# Altium PCB PCB_2020-12-27_16-28-50_2021-02-20_20-59-34.pcbdoc
Units mil, origin at the board's own origin, x right, y up, seen from the top; angles counter-clockwise.
Board outline 1772 x 1772 mil, 4 copper layers (Top Layer, Mid-Layer 1, Mid-Layer 2, Bottom Layer); 56 components, 51 nets, 244 pads, 208 vias.
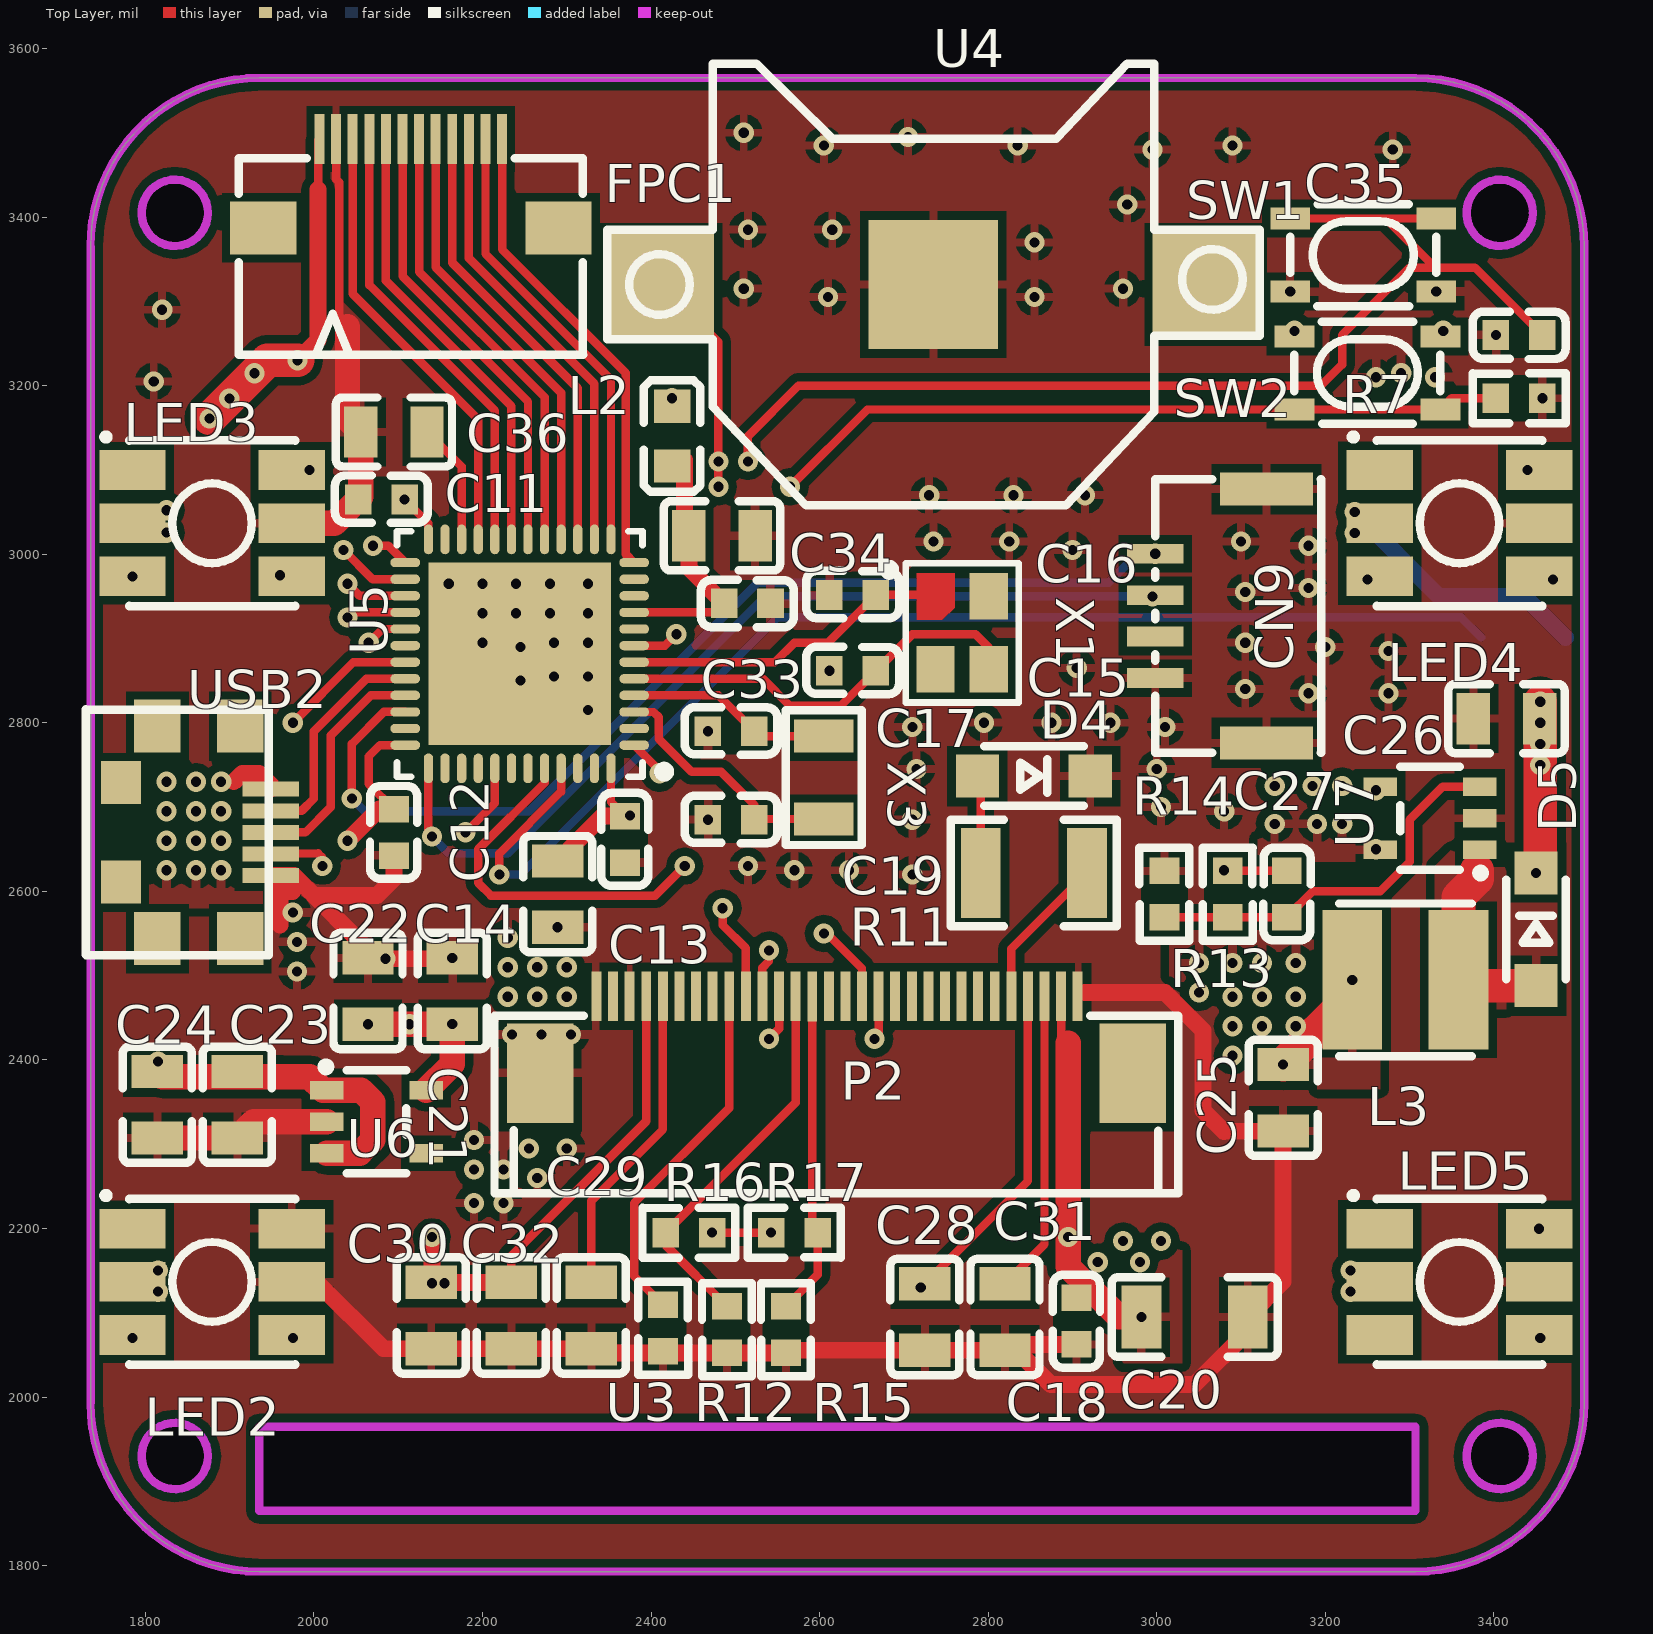
[diagram p0: Top Layer view]
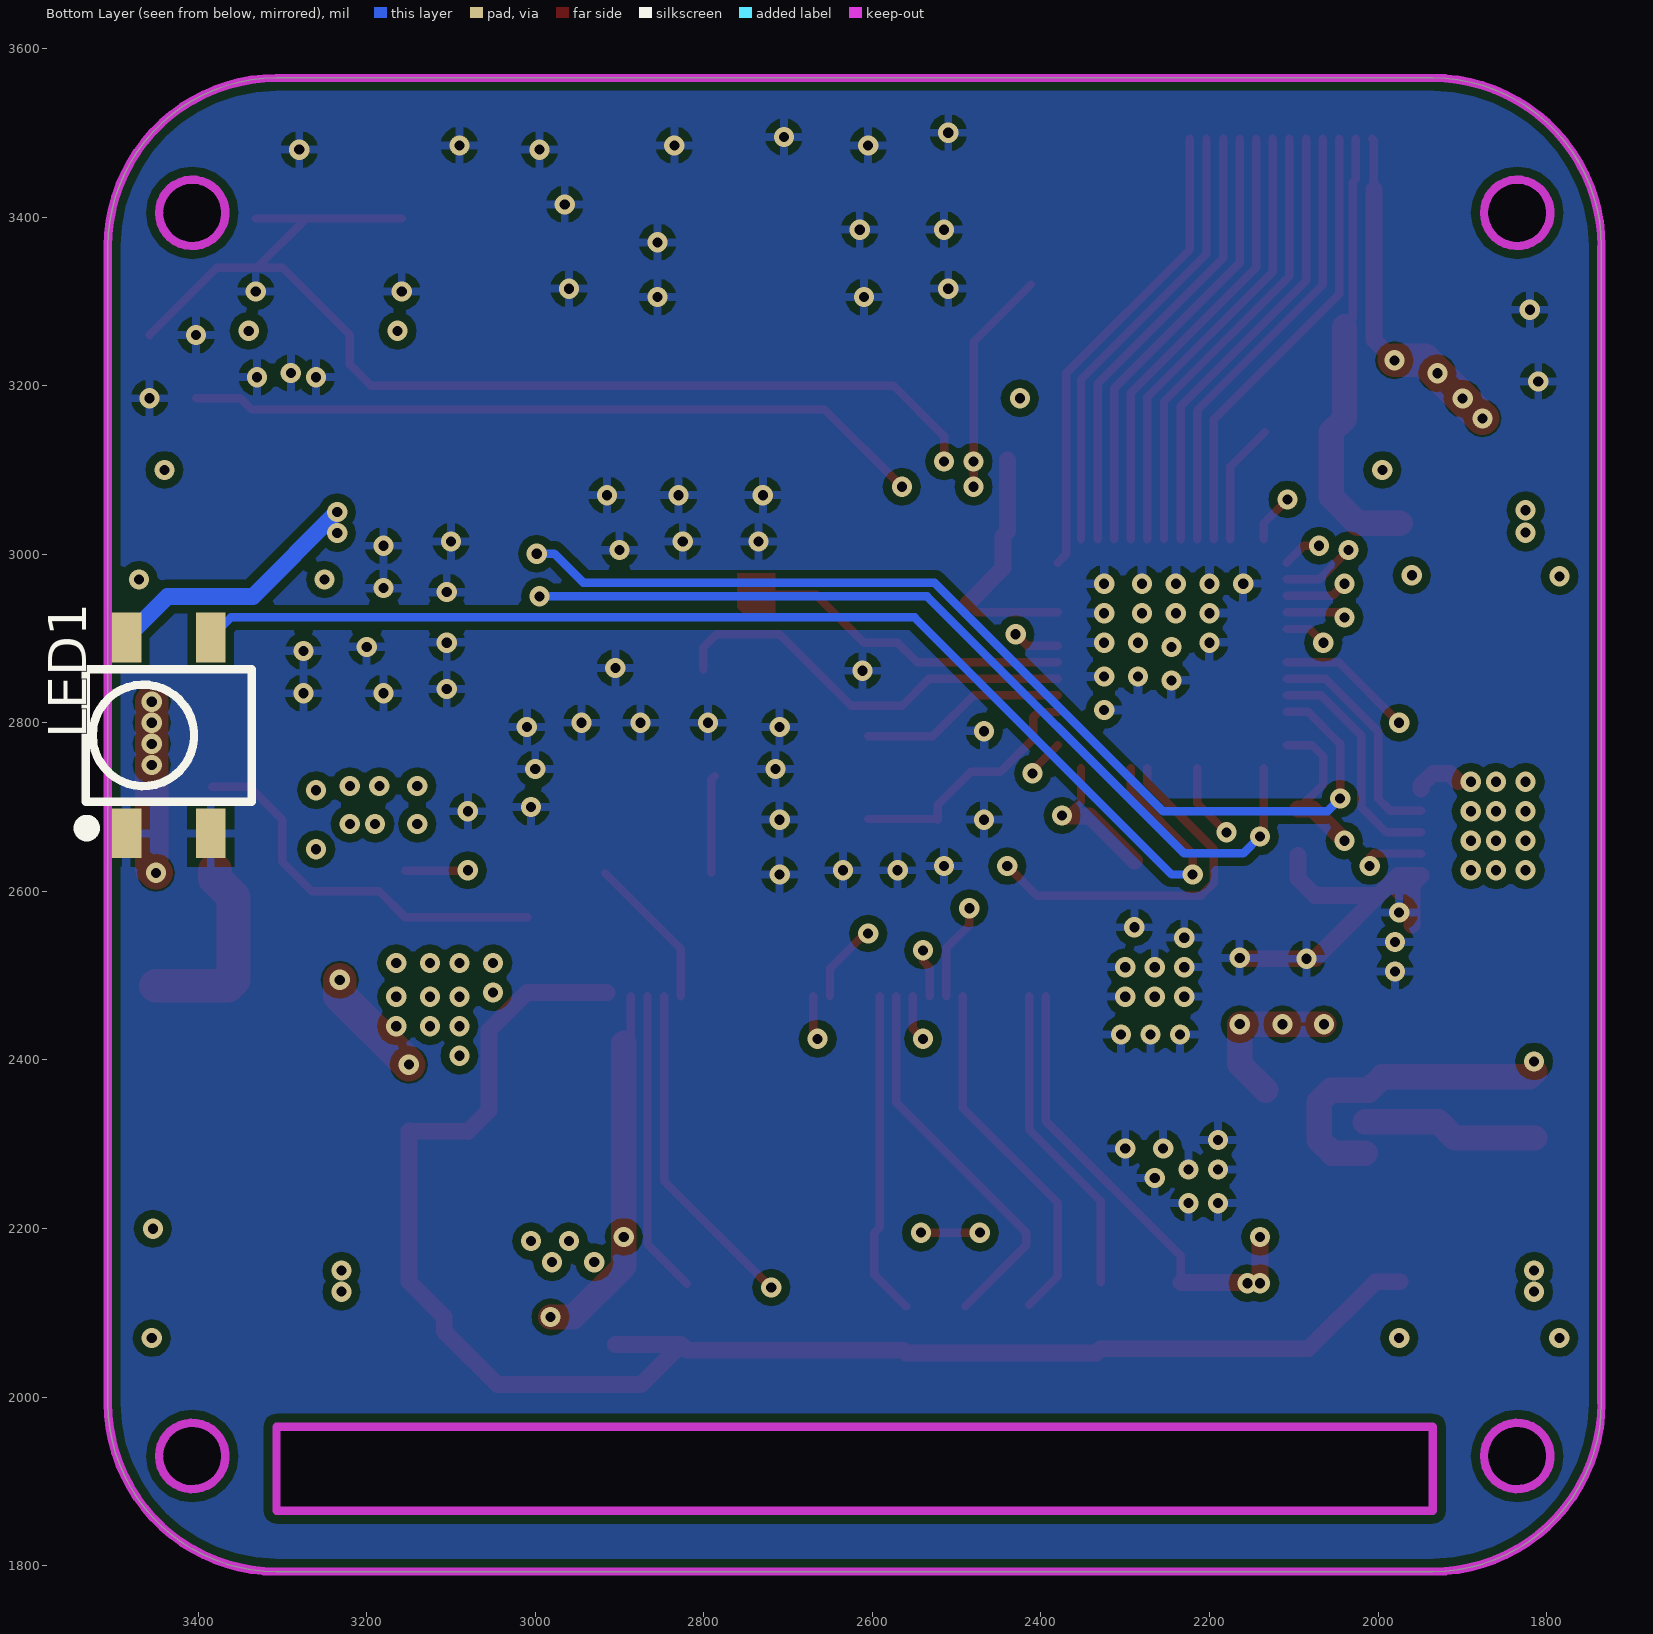
[diagram p1: Bottom Layer view, seen from below]
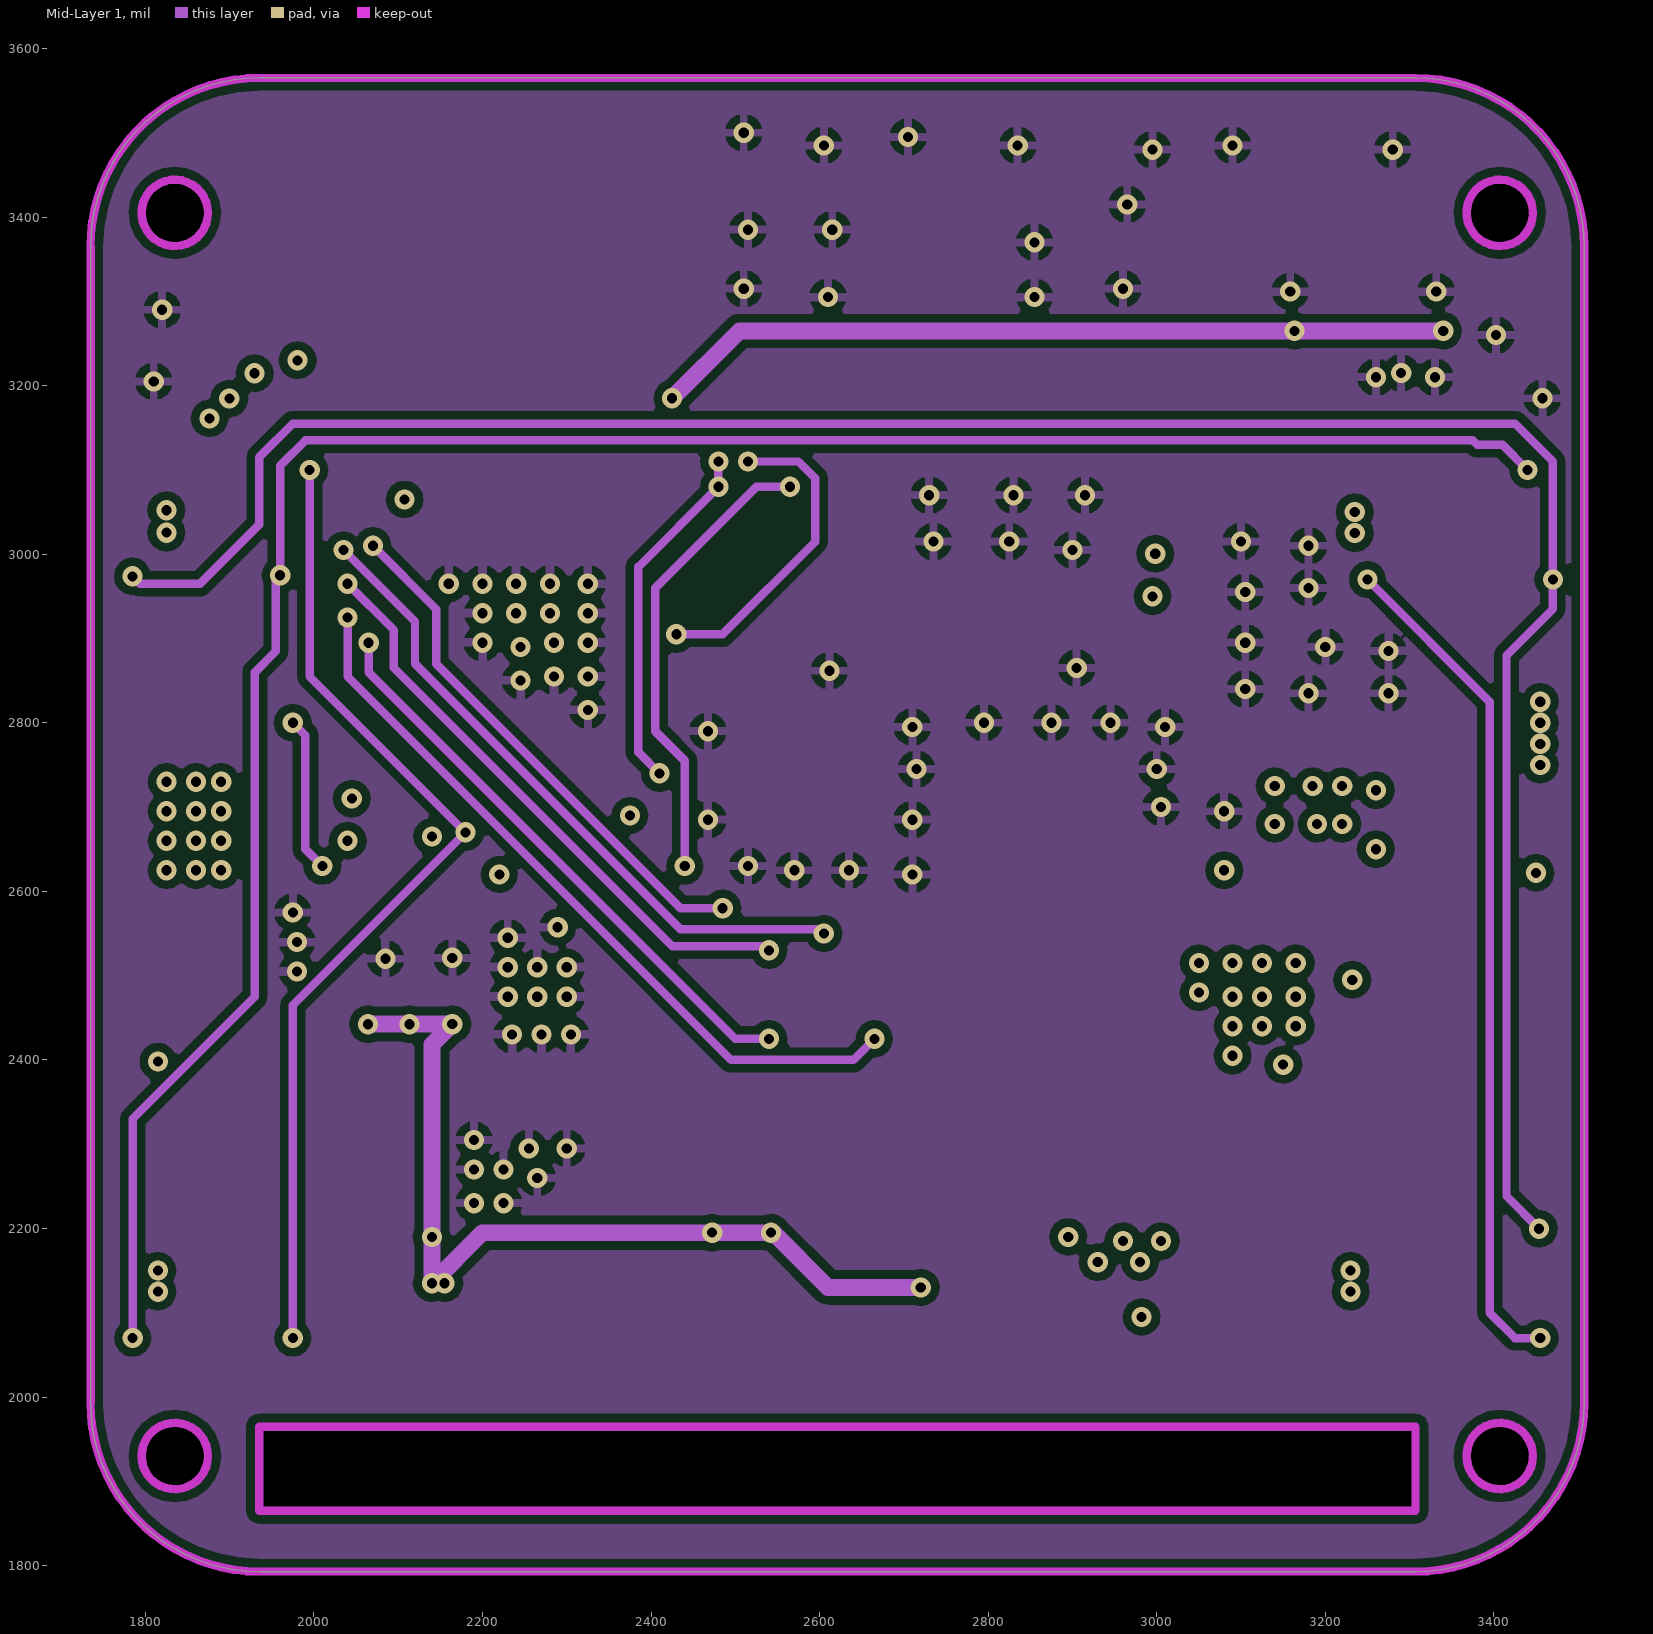
[diagram p2: Mid-Layer 1]
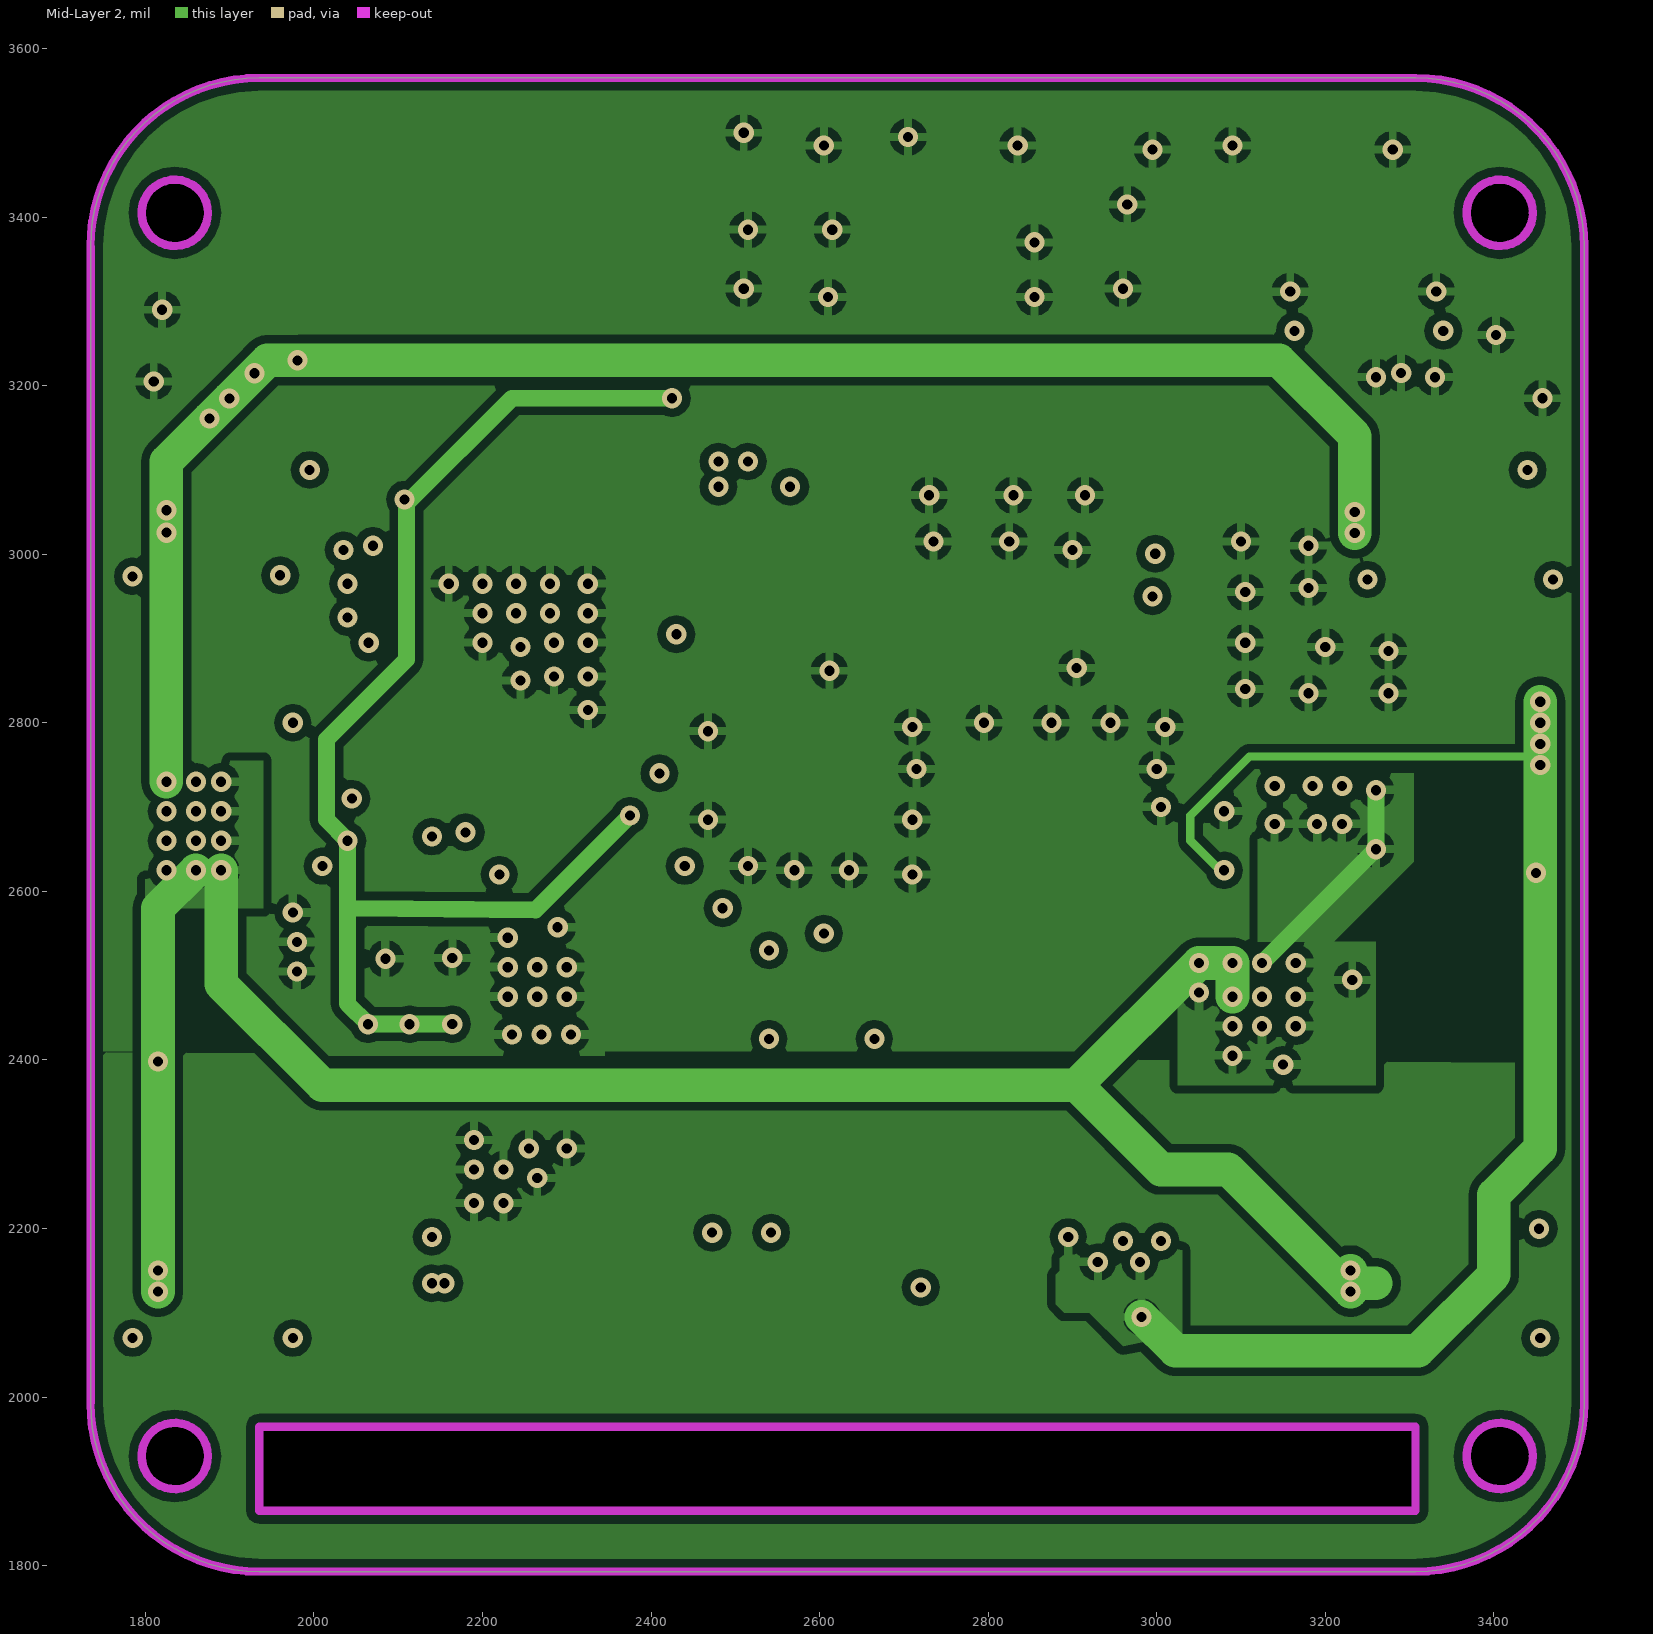
[diagram p3: Mid-Layer 2]
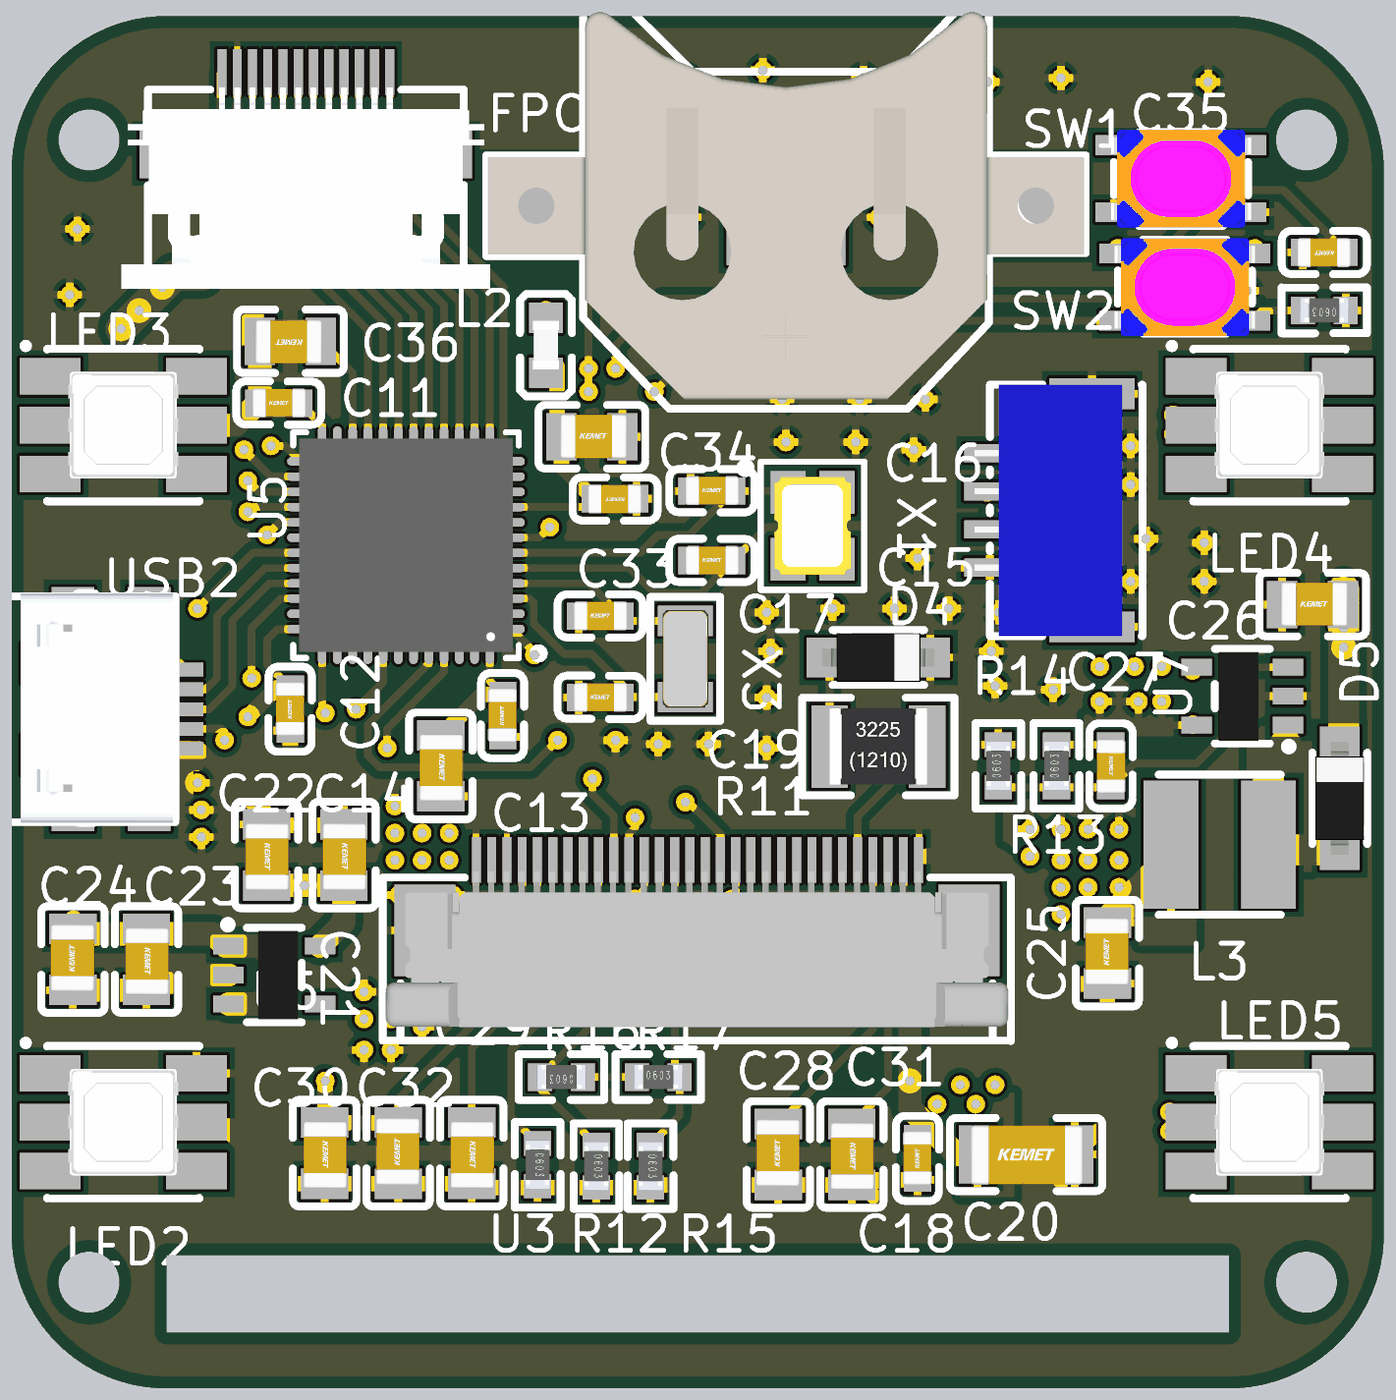
[diagram p4: 3D render of the assembled board from above, using the file's embedded part models]

## Layer stack, top to bottom
Top Solder: solder mask 0.4, Solder Resist, Dk 3.5
Top Layer: signal copper 1.4
Dielectric1: dielectric 12.6, FR-4, Dk 2
Mid-Layer 1: signal copper 1.4
Dielectric3: dielectric 12.6, FR-4, Dk 2
Mid-Layer 2: signal copper 1.4
Dielectric2: dielectric 12.6, FR-4, Dk 2
Bottom Layer: signal copper 1.4
Bottom Solder: solder mask 0.4, Solder Resist, Dk 3.5

## Board outline
1735,1993 1735,3364.98 cw(c1935,3365) 1935.2,3565 3307,3565 cw(c3307,3365) 3507,3365 3507,1993 cw(c3307,1993) 3307,1793 1935,1793 cw(c1935,1993)
cut-out: 1835,3365.63 cw(c1835,3405) 1795.63,3405 cw(c1835,3405) 1835,3444.37 cw(c1835,3405) 1874.37,3405 cw(c1835,3405)
cut-out: 3367.63,3405 ccw(c3407,3405) 3407,3365.63 ccw(c3407,3405) 3446.37,3405 ccw(c3407,3405) 3407,3444.37 ccw(c3407,3405)
cut-out: 3367.63,1930 ccw(c3407,1930) 3407,1890.63 ccw(c3407,1930) 3446.37,1930 ccw(c3407,1930) 3407,1969.37 ccw(c3407,1930)
cut-out: 1835,1890.63 cw(c1835,1930) 1795.63,1930 cw(c1835,1930) 1835,1969.37 cw(c1835,1930) 1874.37,1930 cw(c1835,1930)
cut-out: 1935,1965 3307,1965 3307,1865 1935,1865

## Design rules (kind name [scope] priority, off if disabled: settings)
Clearance my [All] p1: gap=10 ignorepadtopadclearanceinfootprint=FALSE except(0: Arc-Hole Track-Hole SMDPad-Hole THPad-Hole Via-Hole Fill-Hole Poly-Hole Region-Hole Text-Hole)
Clearance [All] p2: gap=10 ignorepadtopadclearanceinfootprint=FALSE except(0: Arc-Hole Track-Hole SMDPad-Hole THPad-Hole Via-Hole Fill-Hole Poly-Hole Region-Hole Text-Hole)
PolygonConnect [All] p1: connectstyle=Relief reliefconductorwidth=10 reliefentries=4 polygonreliefangle="90 Angle" airgapwidth=10
RoutingVias [All] p1: holewidth=28 width=50 viastyle="Through Hole" minholewidth=28 minwidth=50 maxholewidth=28 maxwidth=50
SolderMaskExpansion [All] p1: expansion=4 istentingtop=FALSE
Width [All] p1: maxlimit=10 minlimit=10 preferedwidth=10
30 further rules are at their usual default settings.

## Components (designator, comment, footprint, x,y, rotation, side; value= is the part's Value field where it differs from the comment)
C11 "100nF" C0603 2080,3065 r0 top
C12 "100nF" C0603 2095,2670 r90 top
C13 "100nF" C0603 2369.21,2661.73 r90 top
C14 "4.7uF" C0805 2289.21,2596.73 r270 top
C15 "12pF" C0603 2639.21,2861.73 r0 top
C16 "12pF" C0603 2639.21,2951.73 r0 top
C17 "12pF" C0603 2495,2790 r0 top
C18 "100nF" C0603 2905,2090 r90 top
C19 "12pF" C0603 2495,2685 r0 top
C20 "10uF" C1206 3045,2095 r0 top
C21 "10uF" C0805 2164.21,2481.73 r270 top
C22 "100nF" C0805 2064.21,2481.73 r270 top
C23 "100nF" C0805 1909.21,2346.73 r270 top
C24 "10uF" C0805 1814.21,2346.73 r90 top
C25 "4.7uF" C0805 3150,2355 r90 top
C26 "4.7uF" C0805 3415,2805 r0 top
C27 "220pF" C0603 3154.21,2596.73 r270 top
C28 "1uF" C0805 2725,2095 r90 top
C29 "1uF" C0805 2329.21,2096.73 r270 top
C30 "1uF" C0805 2139.21,2096.73 r270 top
C31 "4.7uF" C0805 2820,2095 r270 top
C32 "4.7uF" C0805 2234.21,2096.73 r90 top
C33 "100nF" C0603 2514.21,2941.73 r180 top
C34 "1uF" C0805 2484.21,3021.73 r0 top
C35 "100nF" C0603 3430,3260 r180 top
C36 "4.7uF" C0805 2095,3145 r180 top
CN9 "A1257WV-S-4P" CONN-SMD_A1257WV-S-4P 3064.21,2926.73 r90 top
D4 "1N4148W_C466653" SOD-123_L2.7-W1.6-LS3.7-RD 2854.21,2736.73 r180 top
D5 "1N4148W_C466653" SOD-123_L2.7-W1.6-LS3.7-RD 3450,2555 r270 top
FPC1 "AFC01-S12FCA-00" FPC-SMD_AFC01-S12FCA-00 2115,3440 r0 top
L2 "600Ω" L0603 2425,3140 r270 top
L3 "10uH" IND-SMD_L4.0-W4.0 3295,2495 r0 top
LED1 "IRM-H638J7/TR2(CLW)" OPTO-SMD-4_L5.0-W4.0-P2.54-TL 3435,2785 r270 bottom
LED2 "WS2813C" LED-ARRAY-SMD_6P-L5.4-W5.0-TL-FD 1879.21,2136.73 r0 top
LED3 "WS2813C" LED-ARRAY-SMD_6P-L5.4-W5.0-TL-FD 1879.21,3036.73 r0 top
LED4 "WS2813C" LED-ARRAY-SMD_6P-L5.4-W5.0-TL-FD 3359.21,3036.73 r0 top
LED5 "WS2813C" LED-ARRAY-SMD_6P-L5.4-W5.0-TL-FD 3359.21,2136.73 r0 top
P2 "FPC 0.5MM 30P Pull type H2.0mm Pick up" FPC-SMD_AFC07-S30ECC-00 2620,2430 r0 top
R7 "10K" R0603 3430,3185 r180 top
R11 "51" R1210 2854.21,2621.73 r0 top
R12 "10K" R0603 2490,2080 r270 top
R13 "127K" R0603 3084.21,2596.73 r90 top
R14 "13.3K" R0603 3009.21,2596.73 r90 top
R15 "10K" R0603 2560,2080 r270 top
R16 "10K" R0603 2445,2195 r180 top
R17 "10K" R0603 2570,2195 r0 top
SW1 "K2-1808SN-A4SW" KEY-SMD_4P-L4.2-W3.2-P2.20-LS5.1-TL 3245,3355 r0 top
SW2 "K2-1808SN-A4SW" KEY-SMD_4P-L4.2-W3.2-P2.20-LS5.1-TL 3250,3215 r180 top
U3 "560K" R0603 2414.21,2081.73 r270 top
U4 "CR1220" CR1220-SMD 2735,3320 r0 top
U5 "STM32F411CEU6" UFQFPN-48_L7.0-W7.0-P0.50-BL-EP 2244.21,2881.73 r90 top
U6 "RT9013-33GB" SOT-23-5_L3.0-W1.7-P0.95-LS2.8-BR 2074.21,2326.73 r180 top
U7 "TPS61040DBVR" SOT-23-5_L3.0-W1.7-P0.95-LS2.8-BR 3324.21,2686.73 r0 top
USB2 "micro 5PFour feet full of sticks without holes0.2Half gold tin" MICRO-USB-SMD_5P_C40945 1860,2670 r0 top
X1 "16MHz" OSC-SMD_4P-L3.2-W2.5-BL 2769.21,2906.73 r270 top
X3 "32.768KHz" OSC-SMD_L3.2-W1.5 2605,2735 r90 top

## Footprints (in the part's own frame and the unit in brackets; to place one, negate y for a bottom-side part, rotate by r counter-clockwise, add the part's x,y. Pads: shape width x height; smd on the part's side, far side on the other; paste and mask are expansions set on the pad)
C0603 [mm]
  rect 0.8x0.9 smd: 1(-0.7,0) 2(0.7,0)
  silkscreen extent -1.4,-0.7 1.4,0.72, body extent -0.87,-0.47 0.9,0.48, height 0.95
C0805 [mm]
  rect 1x1.55 smd: 1(-1,0) 2(1,0)
  silkscreen extent -1.75,-1.04 1.75,1.04, body extent -1.04,-0.71 1.16,0.74, height 0.88
C1206 [mm]
  rect 1.2x1.9 smd: 1(-1.6,0) 2(1.6,0)
  silkscreen extent -2.5,-1.2 2.5,1.2, body extent -1.83,-0.99 1.87,0.96, height 1.8
CONN-SMD_A1257WV-S-4P [mm]
  rect 0.6x1.7 smd: 1(1.875,1.675) 2(0.625,1.675) 3(-0.625,1.675) 4(-1.875,1.675)
  rect 1x2.8 smd: 5(3.825,-1.675) 6(-3.825,-1.675)
  silkscreen extent -4.12,-3.33 4.13,1.68, body extent -4.12,-2.67 4.13,2.18, height 4.25
CR1220-SMD [mil]
  rect 126x126 smd: +$1(-323,0) +$2(323,0)
  rect 153.5x153.5 smd: -(0,0)
  silkscreen extent -387,-262 387,262, body extent -385,-250 385,250, height 125
FPC-SMD_AFC01-S12FCA-00 [mil]
  rect 11.9x59.1 smd: 1(-108.28,52.78) 8(29.52,52.78)
  rect 11.8x59.1 smd: 2(-88.63,52.78) 3(-68.93,52.78) 4(-49.23,52.78) 5(-29.53,52.78) 6(-9.83,52.78) 7(9.87,52.78) 9(49.17,52.78) 10(68.87,52.78) 11(88.57,52.78) 12(108.27,52.78)
  rect 78.7x63 smd: 13(-175.2,-52.77) 14(175.2,-52.77)
  silkscreen extent -204,-203 205,30, body extent -238,-227 238,33, height 79
FPC-SMD_AFC07-S30ECC-00 [mm]
  rect 0.3x1.5 smd: 1(7.27,1.153) 2(6.77,1.153) 3(6.27,1.153) 4(5.77,1.153) 5(5.27,1.153) 6(4.77,1.153) 7(4.27,1.153) 8(3.77,1.153) 9(3.27,1.153) 10(2.77,1.153) 11(2.27,1.153) 12(1.77,1.153) 13(1.27,1.153) 14(0.77,1.153) 15(0.274,1.155) 16(-0.229,1.154) 17(-0.729,1.153) 18(-1.229,1.153) 19(-1.729,1.153) 20(-2.231,1.156) 21(-2.731,1.156) 22(-3.231,1.156) 23(-3.731,1.156) 24(-4.232,1.156) 25(-4.731,1.156) 26(-5.232,1.157) 27(-5.732,1.157) 28(-6.232,1.156) 29(-6.731,1.157) 30(-7.232,1.157)
  rect 2x3 smd: 31(-8.925,-1.157) 32(8.925,-1.157)
  silkscreen extent -10.31,-4.79 10.29,0.57, body extent -10.21,-4.33 10.22,0.78, height 2.04
IND-SMD_L4.0-W4.0 [mm]
  rect 1.8x4.2 smd: 1(-1.6,0) 2(1.6,0)
  silkscreen extent -2,-2.3 2,2.3
KEY-SMD_4P-L4.2-W3.2-P2.20-LS5.1-TL [mm]
  rect 1.2x0.65 smd: 1(-2.2,1.1) 2(2.2,1.1) 3(-2.2,-1.1) 4(2.2,-1.1)
  silkscreen extent -2.2,-1.55 2.2,1.52, body extent -2.3,-1.6 2.3,1.6, height 2.5
L0603 [mm]
  rect 1x1.1 smd: 1(-0.9,0) 2(0.9,0)
  silkscreen extent -1.68,-0.85 1.68,0.85, body extent -0.8,-0.43 0.8,0.43, height 0.48
LED-ARRAY-SMD_6P-L5.4-W5.0-TL-FD [mm]
  rect 2x1.2 smd: 1(-2.4,1.6) 2(-2.4,0) 3(-2.4,-1.6) 4(2.4,-1.6) 5(2.4,0) 6(2.4,1.6)
  silkscreen extent -3.27,-2.5 2.5,2.67, body extent -1.8,-1.75 1.8,1.75, height 0.95
MICRO-USB-SMD_5P_C40945 [mil]
  rect 47.3x51.1 smd: 0(-89.03,-59.05)
  rect 47.3x51.2 smd: 0(-89.03,59.1)
  rect 55.1x63 smd: 0(-45.72,-126) 0(-45.72,126) 0(52.67,-126) 0(52.67,126)
  rect 67x17.8 smd: 1(89.03,51.2) 2(89.03,25.6) 3(89.03,0) 4(89.03,-25.6) 5(89.03,-51.2)
  silkscreen extent -131,-146 87,146, body extent -114,-152 83,155, height 106
OPTO-SMD-4_L5.0-W4.0-P2.54-TL [mm]
  rect 1.5x0.9 smd: 1(2.95,-1.27) 2(2.95,1.27) 3(-2.95,1.27) 4(-2.95,-1.27)
  silkscreen extent -2,-2.67 2.99,2.5
OSC-SMD_4P-L3.2-W2.5-BL [mm]
  rect 1.4x1.15 smd: 2(1.1,-0.8) 3(1.1,0.8) 4(-1.1,0.8)
  Top Layer region: -1.8,-0.225 -0.762,-0.225 -0.4,-0.604 -0.4,-1.375 -1.8,-1.375
  silkscreen extent -2.1,-2.35 2.1,1.7, body extent -1.6,-1.25 1.6,1.25, height 1.05
OSC-SMD_L3.2-W1.5 [mm]
  rect 1x1.8 smd: 1(-1.25,0) 2(1.25,0)
  silkscreen extent -2.03,-1.14 2.03,1.14, body extent -1.6,-0.75 1.6,0.75, height 0.9
R0603 [mm]
  rect 0.8x0.9 smd: 1(-0.7,0) 2(0.7,0)
  silkscreen extent -1.4,-0.75 1.4,0.76, body extent -0.8,-0.4 0.8,0.4, height 0.42
R1210 [mm]
  rect 1.2x2.7 smd: 1(-1.6,0) 2(1.6,0)
  silkscreen extent -2.5,-1.6 2.5,1.6, body extent -1.6,-1.25 1.6,1.25, height 0.55
SOD-123_L2.7-W1.6-LS3.7-RD [mm]
  rect 1.3x1.3 smd: 1(-1.7,0) 2(1.7,0)
  silkscreen extent -1.5,-0.9 1.5,0.9, body extent -1.85,-0.8 1.85,0.8, height 1.32
SOT-23-5_L3.0-W1.7-P0.95-LS2.8-BR [mm]
  rect 1x0.55 smd: 1(1.5,-0.95) 2(1.5,0) 3(1.5,0.95) 4(-1.5,0.95) 5(-1.5,-0.95)
  silkscreen extent -0.9,-1.78 1.65,1.55, body extent -1.38,-1.5 1.12,1.5
UFQFPN-48_L7.0-W7.0-P0.50-BL-EP [mm]
  oval 0.28x0.896 smd: 1(-2.751,-3.449) 2(-2.25,-3.449) 3(-1.75,-3.449) 4(-1.25,-3.449) 5(-0.749,-3.449) 6(-0.249,-3.449) 7(0.249,-3.449) 8(0.749,-3.449) 9(1.25,-3.449) 10(1.75,-3.449) 11(2.25,-3.449) 12(2.751,-3.449) 25(2.751,3.449) 26(2.25,3.449) 27(1.75,3.449) 28(1.25,3.449) 29(0.749,3.449) 30(0.249,3.449) 31(-0.249,3.449) 32(-0.749,3.449) 33(-1.25,3.449) 34(-1.75,3.449) 35(-2.25,3.449) 36(-2.751,3.449)
  oval 0.896x0.28 smd: 13(3.449,-2.751) 14(3.449,-2.25) 15(3.449,-1.75) 16(3.449,-1.25) 17(3.449,-0.749) 18(3.449,-0.249) 19(3.449,0.249) 20(3.449,0.749) 21(3.449,1.25) 22(3.449,1.75) 23(3.449,2.25) 24(3.449,2.751) 37(-3.449,2.751) 38(-3.449,2.25) 39(-3.449,1.75) 40(-3.449,1.25) 41(-3.449,0.749) 42(-3.449,0.249) 43(-3.449,-0.249) 44(-3.449,-0.749) 45(-3.449,-1.25) 46(-3.449,-1.75) 47(-3.449,-2.25) 48(-3.449,-2.751)
  rect 5.5x5.5 smd: 49(0,0)
  silkscreen extent -3.7,-4.5 3.7,3.7, body extent -3.5,-3.5 3.5,3.5, height 0.55

## Via types
v1: diameter 24, hole 12, Top Layer to Bottom Layer, 207 vias
v2: diameter 24/24/24/24 (per signal layer), hole 12, Top Layer to Bottom Layer, 1 vias

## Nets (pads, with @x,y where several pads share a name; then routed paths per layer and width w, separated by ;. In a path a pad name is that pad's centre, name@x,y a point inside that pad or via, vN(x,y) a via of type N, cw(c..) or ccw(c..) an arc to the next point about the centre after c; other vN are vias at no path point)
3V3: C11.2 C12.2 C13.2 C14.1 C21.2 C22.2 C28.2 C30.1 C32.2 L2.1 P2.4 P2.27 R16.1 R17.1 SW2.3 SW2.4 U5.24 U5.36 U5.48 U6.5 | length 5246
  Top Layer w10: C12.2 2065,2727.55 2065,2760 2078.43,2773.43 U5.36 ; v1(2107.55,3065) 2135.91,3036.64 U5.24 ; v1(2140,2135) 2233.11,2135 C32.2 2234.21,2167.12 2394.34,2327.25 P2.27 ; U5.48 2352.51,2705.98 C13.2 ; v1(2472.56,2195) v1(2542.44,2195) ; C28.2 2847.18,2256.55 P2.4
  Top Layer w20: v1(2040,2660) 2077.56,2697.56 C12.2 ; v1(2140,2190) v1(2140,2135) v1(2155,2135) 2156.1,2136.1 C32.2 ; C14.1 2342.4,2689.29 C13.2 2374.29,2689.29 v1(2375,2690)
  Top Layer w30: v1(2064.21,2442.36) v1(2113.49,2442.36) v1(2164.2,2442.4) ; U6.5 2164.2,2395.1 v1(2164.2,2442.4)
  Mid-Layer 1 w20: v1(2064.21,2442.36) v1(2164.2,2442.4) 2140,2418.2 v1(2140,2135) 2200,2195 2545,2195 2610,2130 v1(2720,2130) ; v1(2425,3185) 2505,3265 v1(3340,3265)
  Mid-Layer 2 w20: 2045,2580 2262.86,2577.86 v1(2375,2690) ; v1(2064.21,2442.36) 2040,2466.57 v1(2040,2660) 2015,2685 2015,2780 2110,2875 2110,3060 2235,3185 v1(2425,3185) ; v1(2064.21,2442.36) v1(2164.2,2442.4)
  other v1: 3163.39,3265
5V: C23.1 C24.2 C25.2 FPC1.1 L3.1 LED1.4 LED2.2 LED3.2 LED4.2 LED5.2 U6.1 U6.3 U7.4 U7.5 USB2.1 | length 6068.3
  Top Layer w10: 2005,3400 2005,3491.05 FPC1.1
  Top Layer w20: 1905,2730 1915,2740 1935,2740 1949.03,2725.97 USB2.1 ; v1(1980.68,3230) 2005,3254.32 2005,3432.59
  Top Layer w30: C24.2 1820.31,2380 1995,2380 2010.87,2364.13 U6.1 2055.87,2364.13 2070,2350 2070,2305 2054.33,2289.33 U6.3
  Top Layer w40: v1(1876.16,3161.16) 1945,3230 v1(1980.68,3230) ; v1(3150,2394.37) 3232.01,2476.38 v1(3232.01,2495)
  Mid-Layer 2 w20: v1(3125,2515) v1(3260,2650) v1(3260,2720) ; v1(3230,2125) v1(3230,2150)
  Mid-Layer 2 w40: v1(1815,2125) v1(1815,2150) v1(1815,2398.17) 1815,2580 v1(1860,2625) ; v1(1825,2730) v1(1825,3025.54) v1(1825,3052.21) 1825,3110 v1(1876.16,3161.16) ; v1(1876.16,3161.16) v1(1899.66,3184.66) v1(1929.66,3214.66) 1945,3230 v1(1980.68,3230) 3145,3230 3235,3140 v1(3235,3050) v1(3235,3025) ; v1(1890,2625) 1890,2490 2010,2370 2905,2370 ; v1(3090,2475) v1(3090,2515) v1(3050,2515) 2905,2370 ; v1(3230,2125) 3085,2270 3005,2270 2905,2370 ; v1(3230,2150) 3230,2145 3240,2135 3260,2135
  Bottom Layer w20: v1(3235,3050) 3335,2950 3436.14,2950 LED1.4
  other v1: 3090,2405 3090,2440 3125,2440 3165,2440 3125,2475 3165,2475 3050,2480 3165,2515 1825,2625 1825,2660 1860,2660 1890,2660 3140,2680 3190,2680 3220,2680 1825,2695 1860,2695 1890,2695 3140,2725 3185,2725 3220,2725 1860,2730 1890,2730
13V: C18.2 C20.1 C26.2 C27.1 D5.1 P2.2 R13.2 | length 2418.2
  Top Layer w10: P2.2@2886.55,2475.41 2886.55,2428.45 2895,2420 ; R13.2 C27.1
  Top Layer w30: 2895,2420 v1(2895,2190) 2895,2155 2955,2095 v1(2982.01,2095)
  Top Layer w40: v1(3450,2621.93) 3455,2626.93 v1(3455,2750) v1(3455,2775) v1(3455,2825)
  Mid-Layer 2 w10: v1(3080,2625) 3075,2625 3040,2660 3040,2690 3110,2760 3445,2760 v1(3455,2750)
  Mid-Layer 2 w40: v1(2982.01,2095) 3022.01,2055 3310,2055 3400,2145 3400,2240 3455,2295 v1(3455,2825)
  other v1: 2930,2160 2980,2160 2960,2185 3005,2185 3455,2800
D4_2: D4.2 R11.1 | length 116.6
  Top Layer w10: D4.2 2791.21,2732.8 R11.1
GND: C11.1 C12.1 C13.1 C14.2 C15.1 C16.1 C17.1 C18.1 C19.1 C20.2 C21.1 C22.1 C23.2 C24.1 C25.1 C26.1 C28.1 C29.2 C30.2 C31.2 C32.1 C33.1 C34.2 C35.2 C36.2 CN9.4 CN9.5 CN9.6 D4.1 FPC1.2 LED1.1 LED1.2 LED2.5 LED2.6 LED3.5 LED4.5 LED5.5 P2.1 P2.28 P2.30 P2.31 R7.1 R12.2 R14.2 R15.2 SW1.3 SW1.4 U3.2 U4.- U5.8 U5.23 U5.35 U5.47 U5.49 U6.2 U7.2 USB2.5 | length 3145.3
  Top Layer w10: FPC1.2 2026.4,3445 2030,3441.4 2030,3280 2040,3270 ; 2030,3270 2035,3270
  Top Layer w20: USB2.5 1976.2,2618.8 2075,2520 v1(2085,2520) 2163.11,2520 v1(2164.21,2521.1) ; 1960,2560 1960,2607.82 ; 1962.8,2605 USB2.5 1960,2607.82 ; LED2.5 2003.27,2136.73 2082.64,2057.36 C29.2 2334.14,2052.44 R15.2 ; 1975,2600 1967.83,2600 1960,2607.82 ; 2000,2595 2075,2595 2095,2615 C12.1 ; R15.2 2563.2,2055.6 C31.2 ; C31.2 C31.2@2826.82,2062.45 ; C18.1 C31.2@2826.82,2062.45 ; 2915,2480 3010,2480 3055,2435 3055,2340 3080,2315 C25.1 ; C25.1 3150,2137.01 C20.2 3107.99,2077.99 3045,2015 2874.26,2015 C31.2@2826.82,2062.45
  Top Layer w30: C24.1 C23.2 1928.58,2326.73 U6.2 ; LED3.5 2024.18,3036.73 C11.1 2055.63,3068.18 C36.2 2040,3160.63 2040,3270
  other v1: 2190,2230 2225,2230 2265,2260 2190,2270 2225,2270 2255,2295 2300,2295 2190,2305 2235,2430 2270,2430 2305,2430 2230,2475 2265,2475 2300,2475 1980,2505 2230,2510 2265,2510 2300,2510 1980,2540 2230,2545 2289.21,2557.36 1975,2575 2710,2620 2570,2625 2635,2625 2515,2630 2467.45,2685 2710,2685 3080,2695 3005,2700 2715,2745 3000,2745 2467.45,2790 2710,2795 3010,2795 2795,2800 2875,2800 2945,2800 2325,2815 3180,2835 3275,2835 3105,2840 2245,2850 2285,2855 2325,2855 2611.66,2861.73 2905,2865 3275,2885 2245,2890 3200,2890 2200,2895 2285,2895 2325,2895 3105,2895 2200,2930 2240,2930 2280,2930 2325,2930 3105,2955 3180,2960 2160,2965 2200,2965 2240,2965 2280,2965 2325,2965 2900,3005 3180,3010 2735,3015 2825,3015 3100,3015 2730,3070 2830,3070 2915,3070 3457.56,3185 1810,3205 3260,3210 3330,3210 3290,3215 3402.45,3260 1820,3290 2610,3305 2855,3305 3158.39,3311.69 3331.61,3311.69 2510,3315 2960,3315 2515,3385 2615,3385 2965,3415 2995,3480 3280,3480 2605,3485 2835,3485 3090,3485 2705,3495 2510,3500
  other v2: 2855,3370
LED2_3: LED2.3 LED3.4 LED4.6 | length 2614.4
  Mid-Layer 1 w10: v1(1785,2070) 1785,2330 1930,2475 1930,2860 1955,2885 1955,2970 v1(1960,2975) 1960,3105 1990,3135 3375,3135 3380,3130 3410,3130 v1(3440,3100)
LED3_3: LED3.3 LED4.4 LED5.6 | length 2792.4
  Mid-Layer 1 w10: v1(1784.72,2973.74) 1793.5,2965 1865,2965 1935,3035 1935,3115 1975,3155 3425,3155 3470,3110 v1(3470,2970) 3470,2935 3415,2880 3415,2520.8 ; 3415,2531.03 3415,2238.42 v1(3453.7,2199.72)
LED4_3: LED4.3 LED5.4 | length 1002.5
  Mid-Layer 1 w10: v1(3250,2970) 3395,2825 3395,2100 3425,2070 v1(3455,2070)
P2_3: C31.1 P2.3 | length 360.5
  Top Layer w10: C31.1 2866.87,2181.24 P2.3
P2_5: P2.5 R11.2 | length 183.5
  Top Layer w10: P2.5 2827.5,2532.03 R11.2
P2_17: P2.17 R15.1 R17.2 | length 386
  Top Layer w10: R15.1 2597.56,2145.12 R17.2 2591.29,2201.27 P2.17
P2_18: P2.18 R12.1 R16.2 | length 461.8
  Top Layer w10: R12.1 2417.44,2180.12 R16.2 2571.62,2349.18 P2.18
P2_22: P2.22 U3.1 | length 427.1
  Top Layer w10: U3.1 2380,2143.5 2380,2230 2492.8,2342.8 P2.22
P2_26: C29.1 P2.26 | length 374.6
  Top Layer w10: C29.1 2329.21,2232.76 2414.02,2317.57 P2.26
PA2: FPC1.12 U5.12 | length 567.7
  Top Layer w10: FPC1.12 2223.3,3361.7 2370,3215 2370,3000 U5.12
PA3: FPC1.11 U5.13 | length 537
  Top Layer w10: FPC1.11 2203.6,3356.4 2352.5,3207.5 U5.13
PA4: FPC1.10 U5.14 | length 537
  Top Layer w10: FPC1.10 2183.9,3351.1 2332.8,3202.2 U5.14
PA5: FPC1.9 U5.15 | length 537
  Top Layer w10: FPC1.9 2164.2,3345.8 2313.1,3196.9 U5.15
PA6: FPC1.8 U5.16 | length 537
  Top Layer w10: FPC1.8 2144.5,3340.5 2293.4,3191.6 U5.16
PA7: FPC1.7 U5.17 | length 536.9
  Top Layer w10: FPC1.7 2124.9,3335.1 2273.7,3186.3 U5.17
PA8: P2.19 U5.29 | length 795.7
  Top Layer w10: v1(2065,2895) 2081.24,2911.24 U5.29 ; v1(2540,2425) 2551.94,2436.94 P2.19
  Mid-Layer 1 w10: v1(2065,2895) 2065,2860 2500,2425 v1(2540,2425)
PA10: U5.31 USB2.4 | length 420.8
  Top Layer w10: USB2.4 2005,2645 2010,2640 v1(2010,2630) ; v1(1975,2800) 2046.93,2871.93 U5.31
  Mid-Layer 1 w10: v1(1975,2800) 1990,2785 1990,2650 v1(2010,2630)
PA11: U5.32 USB2.2 | length 271.1
  Top Layer w10: USB2.2 1985.6,2695.6 2000,2710 2000,2790 2062.2,2852.2 U5.32
PA12: U5.33 USB2.3 | length 276.5
  Top Layer w10: USB2.3 1990,2670 2020,2700 2020,2785 2067.5,2832.5 U5.33
PA13: CN9.1 U5.34 | length 1230.1
  Top Layer w10: v1(2045,2710) 2045,2775 2082.83,2812.83 U5.34
  Bottom Layer w10: v1(2045,2710) 2060,2695 2255,2695 2526.1,2966.1 2942.9,2966.1 2977.4,3000.5 v1@2998.3,3000.5
  other v1: 2998.27,3000.55
PA14: CN9.2 U5.37 | length 1072.2
  Top Layer w10: U5.37 2135.91,2669.09 v1(2140,2665)
  Bottom Layer w10: v1(2140,2665) 2160,2645 2230,2645 2535,2950 v1(2995,2950)
PB0: FPC1.6 U5.18 | length 536.9
  Top Layer w10: FPC1.6 2105.2,3329.8 2254,3181 U5.18
PB1: FPC1.5 U5.19 | length 537
  Top Layer w10: FPC1.5 2085.5,3324.5 2234.4,3175.6 U5.19
PB2: FPC1.4 U5.20 | length 537
  Top Layer w10: FPC1.4 2065.8,3319.2 2214.7,3170.3 U5.20
PB5: LED2.4 LED3.6 U5.41 | length 1281.9
  Top Layer w10: v1(2180,2670) 2214.71,2704.71 U5.41
  Mid-Layer 1 w10: v1(1975,2070) 1975,2465 v1(2180,2670) 1995,2855 v1(1995,3100)
PB8: LED1.3 U5.45 | length 1457.6
  Top Layer w10: v1(2220,2620) 2220,2645 2293.41,2718.41 U5.45
  Bottom Layer w10: v1(2220,2620) 2245,2620 2550,2925 2845,2925 3361.14,2925 LED1.3
PB10: FPC1.3 U5.21 | length 536.9
  Top Layer w10: FPC1.3 2046.07,3308.93 2195.01,3159.99 U5.21
PB12: P2.21 U5.25 | length 793.7
  Top Layer w10: v1(2070,3010) 2088.45,3010 U5.25 ; v1(2485,2580) 2485,2560 2512.47,2532.53 P2.21
  Mid-Layer 1 w10: v1(2070,3010) 2145,2935 2145,2870 2435,2580 v1(2485,2580)
PB13: P2.14 U5.26 | length 974.2
  Top Layer w10: v1(2035,3005) 2069.67,2970.33 U5.26 ; v1(2605,2550) 2609,2550 2650.33,2508.67 P2.14
  Mid-Layer 1 w10: v1(2035,3005) 2120,2920 2120,2870 2435,2555 2605,2555 v1(2605,2550)
PB14: P2.20 U5.27 | length 841.5
  Top Layer w10: v1(2040,2965) 2054.36,2950.64 U5.27 ; P2.20 2532.17,2509.37 2540,2517.2 v1(2540,2530)
  Mid-Layer 1 w10: v1(2040,2965) 2095,2910 2095,2865 2425,2535 2540,2535 v1(2540,2530)
PB15: P2.13 U5.28 | length 1017.2
  Top Layer w10: v1(2040,2925) 2045.93,2930.93 U5.28 ; v1(2665,2425) 2670.02,2430.02 P2.13
  Mid-Layer 1 w10: v1(2040,2925) 2040,2855 2495,2400 2640,2400 v1(2665,2425)
S$68: 
S$3690: 
S$3713: 
S$3715: 
U5_1: U4.+$1 U5.1 | length 743.1
  Top Layer w10: U5.1 2410,2743.45 v1(2410,2740) ; U4.+$1 2480,3252 v1(2480,3080) ; v1(2480,3110) v1@2480,3119.41
  Mid-Layer 1 w10: v1(2410,2740) 2385,2765 2385,2985 v1(2480,3080) v1(2480,3110)
U5_3: C19.2 U5.3 X3.1 | length 303.7
  Top Layer w10: U5.3 2403.1,2812.8 2409.2,2806.7 2409.2,2780.8 2448.3,2741.7 2483.3,2741.7 2522.6,2702.4 C19.2 ; C19.2 2523.35,2685.79 X3.1
U5_4: C17.2 U5.4 X3.2 | length 245
  Top Layer w10: U5.4 2480.02,2832.53 C17.2 2528.34,2784.21 X3.2
U5_5: C15.2 U5.5 X1.3 | length 501.6
  Top Layer w10: U5.5 2532.76,2852.24 2565,2820 2625.03,2820 C15.2 2710.03,2905 2785,2905 2800.71,2889.29 X1.3
U5_6: C16.2 U5.6 | length 391.5
  Top Layer w10: U5.6 2546.93,2871.93 2570,2895 2610.03,2895 C16.2 2736.02,2951.73 2737.71,2950.04
U5_7: C35.1 SW1.1 SW1.2 U5.7 | length 1794.1
  Top Layer w10: U5.7 2416.54,2891.54 v1(2430,2905) ; v1(2515,3110) 2515,3140 2575,3200 3195,3200 3220,3225 3220,3260 3300,3340 3329.97,3340 ; SW1.1 SW1.2 ; 3271.67,3398.3 3329.97,3340 ; C35.1 3377.55,3340 3329.97,3340
  Mid-Layer 1 w10: v1(2430,2905) 2485,2905 2595,3015 2595,3090 2575,3110 v1(2515,3110)
U5_9: C33.2 C34.1 L2.2 U5.9 | length 300.6
  Top Layer w10: U5.9 2475.86,2930.93 C33.2
  Top Layer w20: L2.2@2439.65,3111.73 2439.65,3026.93 C34.1 2444.84,2983.55 C33.2
U5_22: C36.1 U5.22 | length 144.4
  Top Layer w10: C36.1 2175.31,3104.06 U5.22
U5_44: R7.2 SW2.1 SW2.2 U5.44 | length 1869.3
  Top Layer w10: U5.44 2273.7,2728.7 2195,2650 2195,2610 2210,2595 2405,2595 v1(2440,2630) ; v1(2565,3080) 2656.69,3171.69 SW2.2 SW2.1 3349.91,3185 R7.2
  Mid-Layer 1 w10: v1(2440,2630) 2440,2755 2405,2790 2405,2960 2525,3080 v1(2565,3080)
U7_1: D5.2 L3.2 U7.1 | length 234
  Top Layer w40: 3380,2625 3380,2615 3358,2593 L3.2 3364.92,2488.07 D5.2
U7_3: C27.2 R13.1 R14.1 U7.3 | length 467.6
  Top Layer w10: R14.1 C27.2 3185,2600 3265,2600 3300,2635 3300,2685 3339.1,2724.1 U7.3
pads on no net: CN9.3 FPC1.13 FPC1.14 LED2.1 LED3.1 LED4.1 LED5.1 LED5.3 P2.6 P2.7 P2.8 P2.9 P2.10 P2.11 P2.12 P2.15 P2.16 P2.23 P2.24 P2.25 P2.29 P2.32 U4.+$2 U5.2 U5.10 U5.11 U5.30 U5.38 U5.39 U5.40 U5.42 U5.43 U5.46 U6.4 USB2.0 X1.2 X1.4

## Polygon pours and split planes (outlines as drawn)
GND on Top Layer "Top Layer-GND 1" (solid, remove dead copper, pour order 15): 1610,3665 1680,3595 1680,1535 1695,1550 3705,1550 3705,3745
13V on Top Layer "Top Layer-13V" (solid, pour order 10): 2890,2205 3025,2205 3030,2200 3030,2040 2960,2040 2950,2050 2950,2080 2885,2145
5V on Top Layer "Top Layer-5V 2" (solid, pour order 7): 3310,2740 3305,2735 3305,2635 3120,2635 3120,2740
5V on Top Layer "Top Layer-5V 1" (solid, pour order 5): 3015,2540 3015,2380 3030,2365 3265,2365 3265,2575 3260,2580 3015,2580
GND on Top Layer "Top Layer-GND" (solid, pour order 3): 1945,2625 1950,2620 1950,2420 1965,2405 2230,2405 2350,2405 2350,2600 2280,2670 2190,2670 2180,2680 1995,2680
U7_1 on Top Layer "Top Layer-U7_1" (solid, pour order 1): 3475,2460 3475,2655 3470,2660 3360,2660 3330,2630 3330,2460
5V on Top Layer "Top Layer-5V" (solid, pour order 0): 1800,2755 1800,2580 1950,2580 1950,2750 1945,2755
GND on Mid-Layer 2 "Mid-Layer 2-GND 1" (solid, remove dead copper, pour order 11): 1615,2410 1590,2385 1590,1625 1645,1570 3690,1570 3685,1575 3685,2395
GND on Mid-Layer 2 "Mid-Layer 2-GND 2" (solid, remove dead copper, pour order 12): 1510,3685 1545,3650 1545,2280 1675,2410 3195,2410 3195,2580 3395,2580 3395,2380 3400,2375 3535,2375 3580,2420 3580,3765
5V on Mid-Layer 2 "Mid-Layer 2-5V" (solid, pour order 2): 1800,2755 1800,2580 1940,2580 1940,2755
GND on Mid-Layer 2 "Mid-Layer 2-GND" (solid, pour order 4): 1955,2625 1995,2585 2025,2585 2330,2585 2345,2570 2345,2405 1955,2405
5V on Mid-Layer 2 "Mid-Layer 2-5V 1" (solid, pour order 6): 3025,2550 3035,2540 3260,2540 3260,2370 3025,2370
5V on Mid-Layer 2 "Mid-Layer 2-5V 2" (solid, pour order 8): 3120,2540 3120,2740 3305,2740 3305,2635 3210,2540 3190,2540
13V on Mid-Layer 2 "Mid-Layer 2-13V" (solid, pour order 9): 3030,2075 3030,2205 2900,2205 2885,2220 2885,2150 2880,2145 2880,2110 2890,2100 2920,2100 2960,2060
GND on Mid-Layer 1 "Mid-Layer 1-GND" (solid, remove dead copper, pour order 14): 1605,3620 1675,3550 1675,1715 1715,1675 3720,1675 3675,1720 3675,3675
GND on Bottom Layer "Bottom Layer-GND" (solid, remove dead copper, pour order 13): 1500,3775 1530,3745 1530,1500 1560,1530 3740,1530 3725,1545 3725,3795

## Keep-outs
Keep-Out Layer:
  circle w10: c1835,1930 r39.37
  circle w10: c3407,1930 r39.37
  circle w10: c3407,3405 r39.37
  circle w10: c1835,3405 r39.37
  lines w10: 1935,3565 3305,3565 ; 1935.2,3565 ccw(c1935,3365) 1735,3364.98 1735,1993 ccw(c1935,1993) 1935,1793 3307,1793 ccw(c3307,1993) 3507,1993 3507,3365 ccw(c3307,3365) 3307,3565 ; 1935,1865 1935,1965 3307,1965 3307,1865 1935,1865

## Silkscreen, mask and mechanical layers (free items; w line width, h text height)
Document:
  lines w0.1: 2619,2646.5 2621,2648.5